# Altium PCB ingredionradar.PcbDoc
Units mm, origin at the board's own origin, x right, y up, seen from the top; angles counter-clockwise.
Board outline 26 x 19 mm, 4 copper layers (Top Layer, Layer 1, Layer 2, Bottom Layer), stack 0.998 mm thick; 33 components, 32 nets, 171 pads, 53 vias.
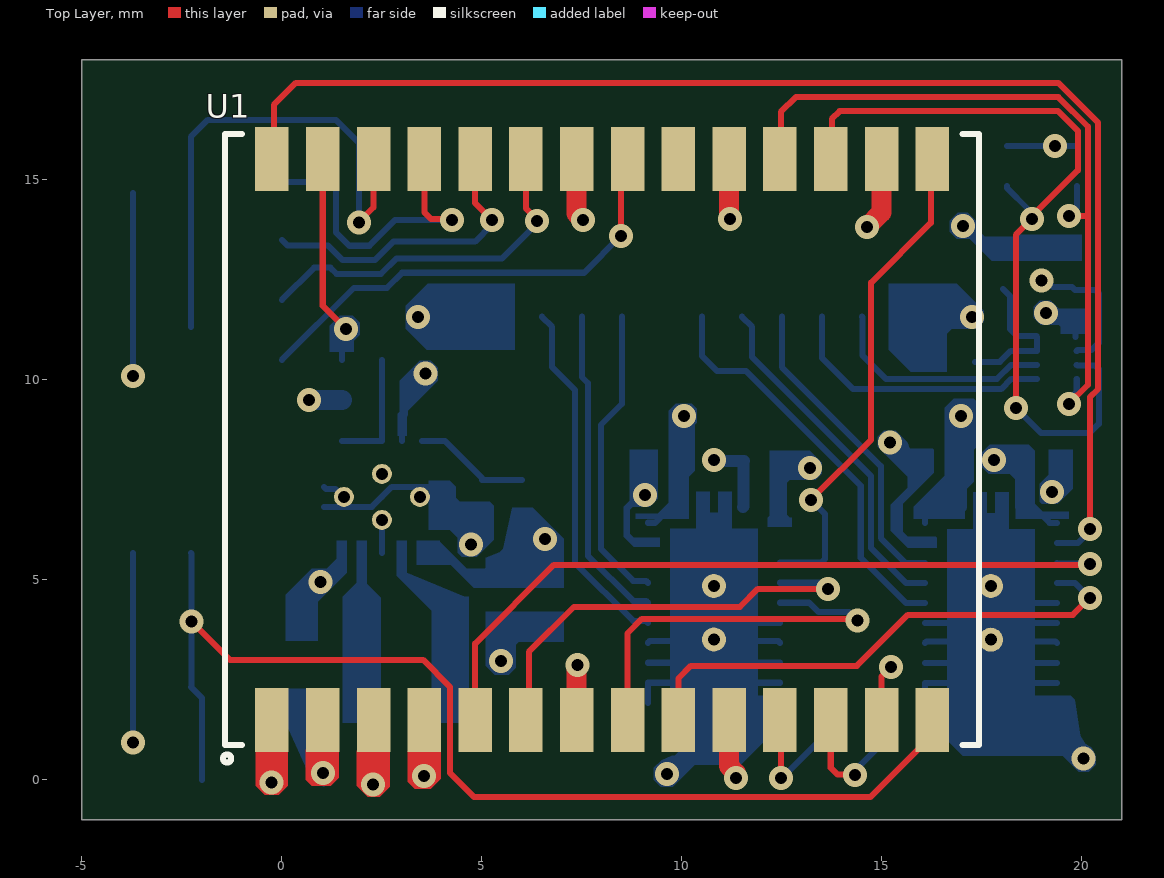
[diagram p0: Top Layer view]
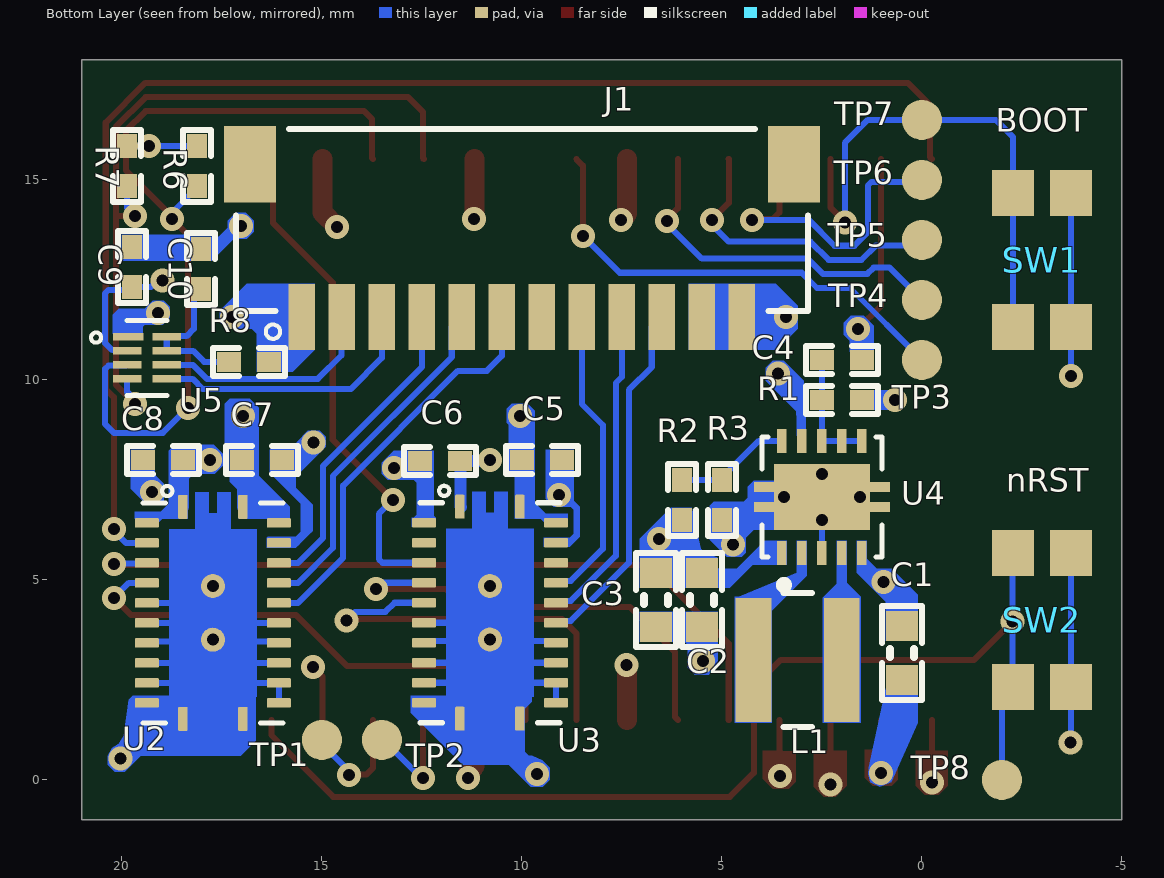
[diagram p1: Bottom Layer view, seen from below]
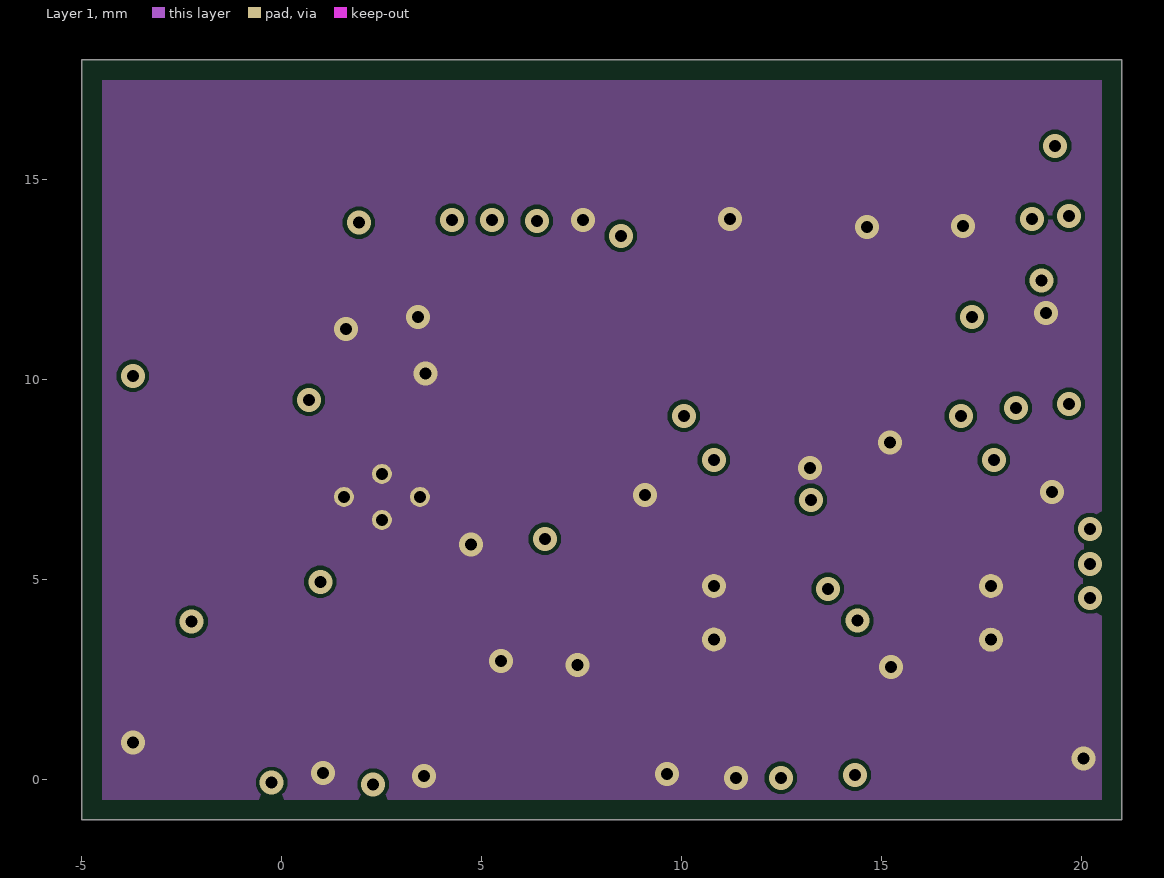
[diagram p2: Layer 1]
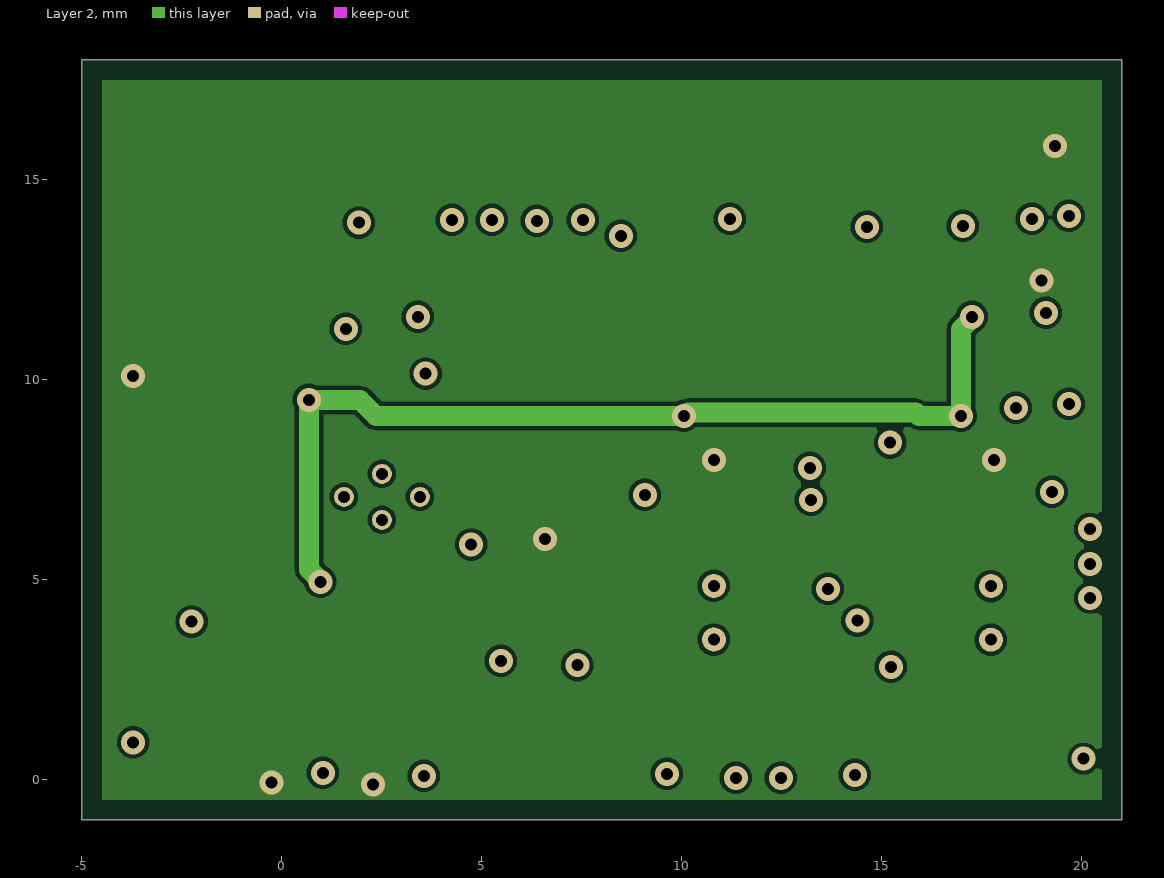
[diagram p3: Layer 2]
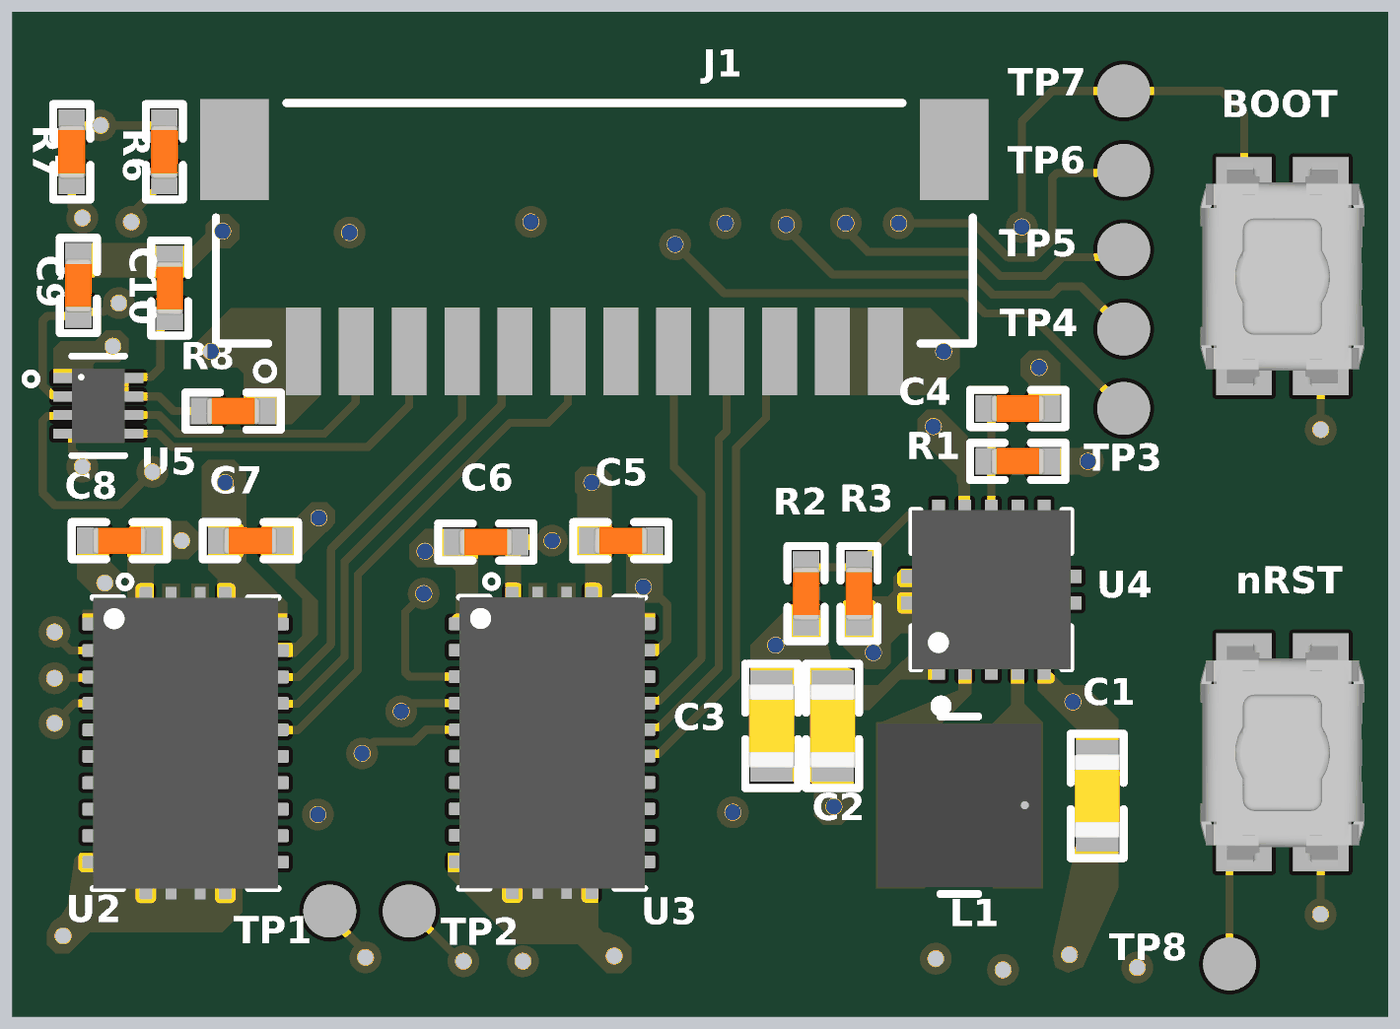
[diagram p4: 3D render of the assembled board from below, using the file's embedded part models]

## Layer stack, top to bottom
Top Solder: solder mask 0.001, Solder Resist, Dk 3.5
Top Layer: signal copper 0.03
Dielectric 1: prepreg 0.0711, PP-006, Dk 4.1
Layer 1: signal copper 0.035
Dielectric 2: prepreg 0.7258, PP-006, Dk 4.1
Layer 2: signal copper 0.035
Dielectric 4: core 0.0711, Dk 4.2
Bottom Layer: signal copper 0.03
Bottom Solder: solder mask 0.001, Solder Resist, Dk 3.5

## Board outline
-5,-1 -5,18 21,18 21,-1

## Design rules (kind name [scope] priority, off if disabled: settings)
BoardOutlineClearance [All] p1: gap=0.5 ignorepadtopadclearanceinfootprint=FALSE
Clearance Polygon_ANT [(InNamedPolygon('Top_Layer-GND')) or (InNamedPolygon('Bottom_Layer-GND')) vs InNet('RF')] p1: gap=0.127 ignorepadtopadclearanceinfootprint=FALSE except(0: Arc-Hole Track-Hole SMDPad-Hole THPad-Hole Via-Hole Fill-Hole Poly-Hole Region-Hole Text-Hole)
Clearance Polygon [(InNamedPolygon('Top_Layer-GND')) or (InNamedPolygon('Bottom_Layer-GND')) or (InNamedPolygon('Mid_Layer_1-GND')) or (InNamedPolygon('Mid_Layer_2-GND'))] p2: gap=0.2 ignorepadtopadclearanceinfootprint=FALSE except(0: Arc-Hole Track-Hole SMDPad-Hole THPad-Hole Via-Hole Fill-Hole Poly-Hole Region-Hole Text-Hole)
Clearance [All] p3: gap=0.1 ignorepadtopadclearanceinfootprint=FALSE
ComponentClearance [All] p1 off: gap=0.254 collisioncheckmode=3 verticalgap=0.254 showdistances=FALSE
FabricationTestPointUsage TestPointUsage [All] p1: valid=0 allowmultiple=FALSE
FabricationTestpoint Testpoint [All] p1: side=3 testpointundercomponent=TRUE minsize=1.016 maxsize=2.54 preferedsize=1.524 minholesize=0 maxholesize=1.016 preferedholesize=0.813 testpointgrid=0.025 allowsidetop=TRUE allowsidebottom=TRUE usegrid=TRUE gridtolerance=0
Height [All] p1 off: minheight=0 maxheight=25.4 prefheight=12.7
HoleSize [All] p1: absolutevalues=TRUE maxlimit=4.064 minlimit=0.076 maxpercent=80.000 minpercent=20.000
HoleToHoleClearance [All] p1 off: gap=0.076 allowstackedmicrovias=FALSE
MinimumAnnularRing [All] p1 off: minimumring=0.2
MinimumSolderMaskSliver [All] p1: minsoldermaskwidth=0.127
PlaneClearance [All] p1: clearance=0.5
PolygonConnect PolygonConnect_1V8 [isVia and innet('1V8')] p1: connectstyle=Direct reliefconductorwidth=0.254 reliefentries=4 polygonreliefangle="90 Angle" airgapwidth=0.254
PolygonConnect PolygonConnect_3V3_SHDN [isVia and innet('3V3_SHDN')] p2: connectstyle=Direct reliefconductorwidth=0.254 reliefentries=4 polygonreliefangle="90 Angle" airgapwidth=0.254
PolygonConnect PolygonConnect_VLOAD [isVia and innet('VLOAD')] p3: connectstyle=Direct reliefconductorwidth=0.254 reliefentries=4 polygonreliefangle="90 Angle" airgapwidth=0.254
PolygonConnect PolygonConnect_NetD4_2 [isVia and innet('NetD4_2')] p4: connectstyle=Direct reliefconductorwidth=0.254 reliefentries=4 polygonreliefangle="90 Angle" airgapwidth=0.254
PolygonConnect PolygonConnect_VBATT [isVia and innet('VBATT')] p5: connectstyle=Direct reliefconductorwidth=0.254 reliefentries=4 polygonreliefangle="90 Angle" airgapwidth=0.254
PolygonConnect PolygonConnect_VDD_NRF [isVia and innet('VDD_NRF')] p6: connectstyle=Direct reliefconductorwidth=0.254 reliefentries=4 polygonreliefangle="90 Angle" airgapwidth=0.254
PolygonConnect PolygonConnect_GND [(isVia or IsPad) and innet('GND')] p7: connectstyle=Direct reliefconductorwidth=0.254 reliefentries=4 polygonreliefangle="90 Angle" airgapwidth=0.254
PolygonConnect [All] p8: connectstyle=Relief reliefconductorwidth=0.254 reliefentries=4 polygonreliefangle="90 Angle" airgapwidth=0.254
RoutingVias [All] p1: holewidth=0.3 width=0.6 viastyle="Through Hole" minholewidth=0.15 minwidth=0.3 maxholewidth=0.7 maxwidth=1.3
SilkToSilkClearance [All] p1: silktosilkclearance=0.127
SilkToSolderMaskClearance SilkscreenOverComponentPads [IsPad] p1: minsilkscreentomaskgap=0.254 clearancetoexposedcopper=TRUE
SolderMaskExpansion [All] p1: expansion=0.076 istentingtop=FALSE
SupplyNets "Schematic Supply Nets_2" [InNet('VIN')] p1: voltage=0.000
SupplyNets "Schematic Supply Nets_1" [InNet('GND')] p2: voltage=0.000
SupplyNets "Schematic Supply Nets" [InNet('1V8')] p3: voltage=0.000
Width [All] p1: maxlimit=2.54 minlimit=0.152 preferedwidth=0.152
20 further rules are at their usual default settings.

## Components (designator, comment, footprint, x,y, rotation, side; value= is the part's Value field where it differs from the comment)
C1 "10uF" CAP0603 0.5,3.175 r90 bottom
C2 "10uF" CAP0603 5.5,4.5 r90 bottom
C3 "10uF" CAP0603 6.65,4.5 r90 bottom
C4 "0.1uF" CAP0402 2,10.5 r0 bottom
C5 "1uF" CAP0402 9.5,8 r0 bottom
C6 "1uF" CAP0402 12.05,7.975 r180 bottom
C7 "1uF" CAP0402 16.5,8 r0 bottom
C8 "1uF" CAP0402 18.975,8 r180 bottom
C9 "1uF" CAP0402 19.75,12.825 r270 bottom
C10 "1uF" CAP0402 18.025,12.775 r270 bottom
J1 "SM12B-SRSS-TB" CONN_SM12B-SRSS-TBLFSN_JST 10,14 r0 bottom
L1 "VLS3012HBX-2R2M" IND_VLS3012HBX_TDK 3.105,3 r0 bottom
R1 "100" RES0402 2,9.5 r180 bottom
R2 "523k" RES0402 6,7 r270 bottom
R3 "200k" RES0402 5,7 r90 bottom
R6 "2.2k" RES0402 18.125,15.35 r270 bottom
R7 "2.2k" RES0402 19.875,15.35 r270 bottom
R8 "200k" RES0402 16.825,10.45 r0 bottom
SW1 "EVP-AA402W" EVPXA -3,13 r90 bottom
SW2 "EVP-AA402W" EVPXA -3,4 r90 bottom
TP1 "TP_SMT" TP_SMT_1.5MM 15,1 r180 bottom
TP2 "TP_SMT" TP_SMT_1.5MM 13.5,1 r90 bottom
TP3 "TP_SMT" TP_SMT_1.5MM 0,10.5 r90 bottom
TP4 "TP_SMT" TP_SMT_1.5MM 0,12 r90 bottom
TP5 "TP_SMT" TP_SMT_1.5MM 0,13.5 r90 bottom
TP6 "TP_SMT" TP_SMT_1.5MM 0,15 r90 bottom
TP7 "TP_SMT" TP_SMT_1.5MM 0,16.5 r90 bottom
TP8 "TP_SMT" TP_SMT_1.5MM -2,0 r90 bottom
U1 "XM125" XM125_ACC 8.005,8.51 r90 top
U2 "SN74LVC8T245RHLR" IC_SN74LVC8T245RHLR 17.725,4.175 r180 bottom
U3 "SN74LVC8T245RHLR" IC_SN74LVC8T245RHLR 10.8,4.18 r180 bottom
U4 "TPS63000DRCR" CONV_TPS63000DRCR 2.5,7.075 r90 bottom
U5 "PCA9306DQER" SON35P140X100X40-8N 19.375,10.55 r180 bottom

## Footprints (in the part's own frame and the unit in brackets; to place one, negate y for a bottom-side part, rotate by r counter-clockwise, add the part's x,y. Pads: shape width x height; smd on the part's side, far side on the other; paste and mask are expansions set on the pad)
CAP0402 [mm]
  rect 0.6x0.5 smd: 1(-0.5,0) 2(0.5,0)
  silkscreen extent -0.9,-0.35 0.9,0.35, body extent -0.51,-0.25 0.51,0.25, height 0.5
CAP0603 [mm]
  rect 0.75x0.8 smd: 1(-0.675,0) 2(0.675,0)
  silkscreen extent -1.17,-0.5 1.17,0.5, body extent -0.8,-0.43 0.8,0.43, height 0.8
CONN_SM12B-SRSS-TBLFSN_JST [mil]
  rect 26x65 smd paste+0 mask+0: 1(216.54,95.33) 2(177.17,95.33) 3(137.8,95.33) 4(98.43,95.33) 5(59.06,95.33) 6(19.69,95.33) 7(-19.68,95.33) 8(-59.06,95.33) 9(-98.43,95.33) 10(-137.8,95.33) 11(-177.17,95.33) 12(-216.54,95.33)
  rect 51x75 smd paste+0 mask+0: 13(-267.72,-54.87) 14(267.72,-54.87)
  silkscreen extent -282,-90 282,117, body extent -276,-84 276,84, height 116
CONV_TPS63000DRCR [mm]
  rect 0.6x0.24 smd: 1(-1.4,1) 2(-1.4,0.5) 3(-1.4,0) 4(-1.4,-0.5) 5(-1.4,-1) 6(1.4,-1) 7(1.4,-0.5) 8(1.4,0) 9(1.4,0.5) 10(1.4,1)
  rect 1.65x2.4 smd paste-2: 11(0,0)
  rect 0.25x0.5 smd paste-1: 11_1(-0.25,1.45) 11_2(0.25,1.45) 11_3(0.25,-1.45) 11_4(-0.25,-1.45)
  round 0.5 hole 0.3 mask+0: 11_5(0,0.95) 11_6(-0.575,0) 11_7(0.575,0) 11_8(0,-0.95)
  silkscreen extent -2.25,-1.5 1.5,1.5, body extent -1.5,-1.5 1.5,1.5, height 1
EVPXA [mm] "Push-button switch"
  rect 1.15x1.05 smd: 1(-1.675,0.725) 1(1.675,0.725) 2(-1.675,-0.725) 2(1.675,-0.725)
  body extent -2.16,-1.55 2.14,1.55, height 1.7
IC_SN74LVC8T245RHLR [mm]
  rrect25% 0.24x0.6 smd: 1(-0.75,2.65) 12(-0.75,-2.65) 13(0.75,-2.65) 24(0.75,2.65)
  rrect25% 0.6x0.24 smd: 2(-1.65,2.25) 3(-1.65,1.75) 4(-1.65,1.25) 5(-1.65,0.75) 6(-1.65,0.25) 7(-1.65,-0.25) 8(-1.65,-0.75) 9(-1.65,-1.25) 10(-1.65,-1.75) 11(-1.65,-2.25) 14(1.65,-2.25) 15(1.65,-1.75) 16(1.65,-1.25) 17(1.65,-0.75) 18(1.65,-0.25) 19(1.65,0.25) 20(1.65,0.75) 21(1.65,1.25) 22(1.65,1.75) 23(1.65,2.25)
  round 0.6 hole 0.3 mask+0: 25(0,0.67) 26(0,-0.67)
  Top Layer region: 0.445,2.095 1.095,2.095 1.095,-2.095 0.445,-2.095 0.445,-3.02 0.105,-3.02 0.105,-2.495 -0.105,-2.495 -0.105,-3.02 -0.445,-3.02 -0.445,-2.095 -1.095,-2.095 -1.095,2.095 -0.445,2.095 -0.445,3.02 -0.105,3.02 -0.105,2.495 0.105,2.495 0.105,3.02 0.445,3.02
  silkscreen extent -1.75,-2.75 1.75,3.17, body extent -1.75,-2.75 1.75,2.75, height 1
IND_VLS3012HBX_TDK [mil]
  rect 35x122 smd paste+0 mask+0: 1(-43.5,0) 2(43.5,0)
  silkscreen extent -14,-66 14,66, body extent -61,-61 61,61, height 47
RES0402 [mm]
  rect 0.6x0.5 smd: 1(-0.5,0) 2(0.5,0)
  silkscreen extent -0.9,-0.35 0.9,0.35, body extent -0.51,-0.25 0.51,0.25, height 0.5
SON35P140X100X40-8N [mm]
  rect 0.77x0.19 smd: 1(-0.465,0.525)
  rect 0.71x0.19 smd: 2(-0.495,0.175) 3(-0.495,-0.175) 4(-0.495,-0.525) 5(0.495,-0.525) 6(0.495,-0.175) 7(0.495,0.175) 8(0.495,0.525)
  silkscreen extent -1.4,-0.94 0.5,0.94, body extent -0.5,-0.7 0.5,0.7, height 0.4
TP_SMT_1.5MM [mm]
  round 1 smd: 1(0,0)
XM125_ACC [mil]
  rect 63x33 smd paste+0 mask+0: 1(-276,325) 2(-276,275) 3(-276,225) 4(-276,175) 5(-276,125) 6(-276,75) 7(-276,25) 8(-276,-25) 9(-276,-75) 10(-276,-125) 11(-276,-175) 12(-276,-225) 13(-276,-275) 14(-276,-325) 15(276,-325) 16(276,-275) 17(276,-225) 18(276,-175) 19(276,-125) 20(276,-75) 21(276,-25) 22(276,25) 23(276,75) 24(276,125) 25(276,175) 26(276,225) 27(276,275) 28(276,325)
  silkscreen extent -318,-371 300,373, body extent -296,-366 295,366, height 63

## Part data
C1 C2 C3: library part CAP, "Chip Capacitor", Manufacturer="Samsung Electro-Mechanics", Part Number=CL10X106MO8NRNC, Note="CAP CER 10UF 16V X6S 0603", Specification="10 µF ±20% 16V Ceramic Capacitor X6S 0603 (1608 Metric)"
C4: library part CAP, "Chip Capacitor", Manufacturer="Samsung Electro-Mechanics", Part Number=CL05B104KP5NNNC, Note="CAP CER 0.1UF 10V X7R 0402", Specification="0.1 µF ±10% 10V Ceramic Capacitor X7R 0402 (1005 Metric)"
C5 C6 C7 C8 C9 C10: library part CAP, "Chip Capacitor", Manufacturer="Samsung Electro-Mechanics", Part Number=CL05B105KQ5NQNC, Note="CAP CER 1UF 6.3V X7R 0402", Specification="1 µF ±10% 6.3V Ceramic Capacitor X7R 0402 (1005 Metric)"
J1: library part SM12B-SRSS-TBLFSN, "Description", Manufacturer="JST Sales America Inc.", Note="CONN HEADER SMD R/A 12POS 1MM", Part Number=SM12B-SRSS-TB, Specification="Connector Header Surface Mount, Right Angle 12 position 0.039\" (1.00mm)"
L1: "Description", Manufacturer="TDK Corporation", Note="FIXED IND 2.2UH 3.15A 106 MOHM", Part Number=VLS3012HBX-2R2M, Specification="2.2 µH Shielded Drum Core, Wirewound Inductor 3.15 A 106mOhm Max Nonstandard"
R1: library part RES, "Chip Resistor", Manufacturer="Samsung Electro-Mechanics", Part Number=RCS1005F101CS, Note="RES 100 OHM 1% 1/16W 0402", Specification="100 Ohms ±1% 0.063W, 1/16W Chip Resistor 0402 (1005 Metric) Anti-Sulfur, Moisture Resistant Thick Film"
R2: library part RES, "Chip Resistor", Manufacturer="Samsung Electro-Mechanics", Part Number=RCS1005F5233CS, Note="RES 523K OHM 1% 1/16W 0402", Specification="523 kOhms ±1% 0.063W, 1/16W Chip Resistor 0402 (1005 Metric) Anti-Sulfur, Moisture Resistant Thick Film"
R3: library part RES, "Chip Resistor", Manufacturer="Samsung Electro-Mechanics", Part Number=RCS1005F204CS, Note="RES 200K OHM 1% 1/16W 0402", Specification="200 kOhms ±1% 0.063W, 1/16W Chip Resistor 0402 (1005 Metric) Anti-Sulfur, Moisture Resistant Thick Film"
R6 R7: library part RES, "Chip Resistor", Manufacturer="Samsung Electro-Mechanics", Part Number=RC1005F222CS, Note="RES SMD 2.2K OHM 1% 1/16W 0402", Specification="2.2 kOhms ±1% 0.063W, 1/16W Chip Resistor 0402 (1005 Metric) Moisture Resistant Thick Film"
R8: library part RES, "Chip Resistor", Manufacturer="Samsung Electro-Mechanics", Part Number=RC1005J204CS, Note="RES SMD 200K OHM 5% 1/16W 0402", Specification="200 kOhms ±5% 0.063W, 1/16W Chip Resistor 0402 (1005 Metric) Moisture Resistant Thick Film"
SW1 SW2: library part SW_TACT, "SPST, Off-Mom, no ground pin"
TP1 TP2 TP3 TP4 TP5 TP6 TP7 TP8: library part "Test Point", "Test point"
U1: "Description", Manufacturer="Acconeer AB", Note="A121 ENTRY+ RADAR SENSOR MODULE", Part Number=XM125, Specification="Radar Sensor Output"
U2 U3: "8-Bit Dual-Supply Bus Transceiver with Configurable Voltage-Level Shifting and Three-State Outputs 24-VQFN -40 to 85", Manufacturer="Texas Instruments", Note="IC TRANSLATION TXRX 5.5V 24-VQFN", Part Number=SN74LVC8T245RHLR, Specification="Translation Transceiver 1 Element 8 Bit per Element 3-State Output 24-VQFN (5.5x3.5)"
U4: "96% Buck-Boost Converter with 1.8A Current Switches in 3x3 QFN 10-VSON -40 to 85", Manufacturer="Texas Instruments", Note="IC REG BUCK BST ADJ 1.6A 10VSON", Part Number=TPS63000DRCR, Specification="Buck-Boost Switching Regulator IC Positive Adjustable 1.2V 1 Output 1.6A (Switch) 10-VFDFN Exposed Pad"
U5: "2-bit bidirectional 400-kHz I2C/SMBus voltage level translator", Manufacturer="Texas Instruments", Note="IC XLTR VL BIDIR 8-X2SON", Part Number=PCA9306DQER, Specification="Voltage Level Translator Bidirectional 1 Circuit 2 Channel 8-X2SON (1.4x1)"

## Via types
v1: diameter 0.6, hole 0.3, Top Layer to Bottom Layer, tented both sides, 53 vias

## Nets (pads, with @x,y where several pads share a name; then routed paths per layer and width w, separated by ;. In a path a pad name is that pad's centre, name@x,y a point inside that pad or via, vN(x,y) a via of type N, cw(c..) or ccw(c..) an arc to the next point about the centre after c; other vN are vias at no path point)
1V8: C2.2 C3.2 C6.2 C8.2 C9.2 R2.2 R6.1 R7.1 SW1.2 U1.1 U1.3 U2.1 U2.2 U3.1 U4.1 U5.2 | length 22.9
  Top Layer w0.152: v1(-0.257,-0.066) -0.25,-0.059 U1.1 ; v1(2.28,-0.111) 2.29,-0.1 U1.3
  Bottom Layer w0.152: v1(-3.725,10.1) -3.725,11.325 SW1.2@-3.725,14.675 ; U4.1 4.125,5.675 4.6,5.2 5.475,5.2 C2.2 ; C2.2@5.525,5.2 C2.2 ; R2.2 6,6.45 6.174,6.276 6.262,6.276 6.513,6.025 v1(6.575,6.025) 6.575,5.25 C3.2 C2.2 ; R6.1 v1(19.329,15.85) R7.1 ; U2.1@18.5,6.8 18.5,6.831 18.519,6.85 18.77,6.85 19.195,6.425 U2.2 ; v1(18.986,12.491) 19.107,12.491 19.273,12.325 C9.2 19.825,12.25 20.335,12.25 20.424,12.161 20.424,10.93 20.238,10.744 19.889,10.744 U5.2
  Bottom Layer w0.3: v1(10.8,8) 10.825,7.975 C6.2 11.537,7.963 11.537,6.832 U3.1@11.525,6.82 ; v1(17.8,8) C8.2 U2.1
CTS: J1.10 U3.18 | length 8.9
  Bottom Layer w0.152: J1.10 6.754,11.325 6.754,10.321 7.325,9.75 7.325,5.427 8.778,3.974 9.106,3.974 U3.18
GND: C1.1 C2.1 C3.1 C4.1 C5.1 C6.1 C7.1 C8.1 C9.1 C10.1 J1.11 J1.12 R3.1 SW2.2 U1.2 U1.4 U1.7 U1.10 U1.13 U1.16 U1.19 U1.22 U1.27 U2.6 U2.7 U2.8 U2.9 U2.10 U2.11 U2.12 U2.13 U2.14 U2.15 U2.16 U2.17 U2.18 U2.22 U2.25 U2.26 U3.2 U3.7 U3.8 U3.9 U3.10 U3.11 U3.12 U3.13 U3.14 U3.15 U3.16 U3.17 U3.22 U3.25 U3.26 U4.3 U4.9 U4.11 U4.11_1 U4.11_2 U4.11_3 U4.11_4 U4.11_5 U4.11_6 U4.11_7 U4.11_8 U5.1 | length 91.1
  Top Layer w0.152: U1.2 1.02,0.18 v1(1.025,0.175) ; U1.27 1.02,11.855 v1(1.6,11.275) ; v1(3.55,0.1) 3.56,0.11 U1.4 ; v1@9.62,0.155 v1(9.625,0.15) ; U1.13 14.99,2.59 v1(15.225,2.825)
  Top Layer w0.5: U1.7 7.37,2.853 v1(7.384,2.867) ; U1.22 7.37,14.155 v1(7.525,14) ; U1.10 11.18,0.343 11.35,0.173 v1(11.35,0.052) ; U1.19 11.18,14.045 v1(11.2,14.025) ; v1(14.625,13.825) 14.99,14.19 U1.16
  Bottom Layer w0.152: SW2.2@-3.725,5.675 -3.725,2.325 -3.725,0.946 v1(-3.72,0.941) ; U4.11_4 2.25,6.825 U4.11 2.75,7.325 U4.11_2 ; U4.11_3 1.099,7.276 1.337,7.276 1.538,7.075 U4.11_8 ; C4.1 1.5,11.175 v1(1.6,11.275) ; U4.3 U4.11_6 ; U4.9 3,9.06 3.076,9.136 3.076,9.637 v1(3.596,10.157) ; v1(3.4,11.575) 3.404,11.579 J1.12 J1.11 ; U4.11_1 4.725,6.825 5,6.55 R3.1 4.826,6.326 4.826,6.103 4.729,6.007 v1(4.729,5.885) ; v1(5.475,2.975) 5.5,3 C2.1 5.525,3.85 C3.1@6.575,3.85 ; C5.1 9,7.2 v1(9.075,7.125) 8.954,7.125 8.795,6.966 8.791,6.966 8.625,6.8 8.625,6.125 8.776,5.974 9.106,5.974 U3.22 ; U3.14 U3.15 10.455,2.43 10.8,2.775 ; U3.16 10.22,2.93 U3.26@10.76,3.47 ; U3.17 9.19,3.47 U3.26@10.76,3.47 ; v1(9.625,0.15) 10.05,0.575 ; U3.13 10.05,0.575 ; U3.12 U3.12@11.55,1.519 ; U3.11 12.45,1.625 12.3,1.475 11.594,1.475 U3.12@11.55,1.519 ; U3.10 11.12,2.43 11.05,2.5 10.8,2.75 10.8,2.775 ; U3.9 11.38,2.93 U3.26@10.84,3.47 ; U3.8 12.41,3.47 U3.26@10.84,3.47 ; U3.7 11.22,3.93 U3.26 ; U3.2 12.45,7.175 12.55,7.275 C6.1 12.724,7.801 13.199,7.801 v1(13.2,7.8) ; v1(15.205,8.43) 15.291,8.344 15.291,8.181 15.472,8 C7.1 16,7.525 15.3,6.825 15.3,6.25 15.625,5.925 U2.22 ; U2.14 U2.15 17.4,2.425 17.7,2.725 U2.26@17.7,3.48 ; U2.16 17.145,2.925 U2.26@17.685,3.465 ; U2.17 16.115,3.465 U2.26@17.685,3.465 ; U2.18 17.305,3.925 U2.26 ; U2.13 16.975,0.814 17.064,0.725 18.35,0.725 18.475,0.85 ; v1(17.025,13.85) 17.6,13.275 C10.1 18.075,13.325 C9.1 ; v1(19.1,11.675) 19.125,11.7 19.625,11.7 19.84,11.485 U5.1 ; v1(19.25,7.2) 19.25,7.297 19.475,7.522 C8.1 ; U2.11 19.375,1.589 19.286,1.5 18.5,1.5 U2.12 18.475,0.85 ; U2.10 18.175,2.425 17.725,2.875 U2.26 ; U2.9 18.305,2.925 U2.26@17.765,3.465 ; U2.8 19.335,3.465 U2.26@17.765,3.465 ; U2.7 18.145,3.925 ; U2.6 18.645,4.425 18.145,3.925 ; v1(20.039,0.53) 19.719,0.85 18.475,0.85 ; 10.05,0.575 11.4,0.575 11.55,0.725 U3.12@11.55,1.519 ; U3.26@10.76,3.47 U3.26 ; 10.8,2.775 U3.26 ; U3.26 U3.26@10.84,3.47 ; U2.26@17.685,3.465 U2.26@17.7,3.48 ; U2.26@17.7,3.48 U2.26 ; U2.26 U2.26@17.765,3.465 ; U2.26 18.145,3.925
INT: J1.4 U2.21 | length 7.9
  Bottom Layer w0.152: J1.4 12.5,10.321 14.975,7.846 14.975,6.046 15.601,5.42 16.07,5.42 U2.21
NetC4_2: C4.2 R1.1 U4.6 U4.7 U4.8 | length 3
  Bottom Layer w0.152: U4.6 U4.7 U4.8 R1.1 C4.2
NetC10_2: C10.2 R8.2 U5.7 U5.8 | length 3.9
  Bottom Layer w0.152: R8.2 17.947,10.45 18.222,10.725 U5.7 U5.8 18.861,11.094 18.381,11.094 18.199,11.276 18.199,12.101 C10.2
NetL1_1: L1.1 U4.4 | length 2.7
  Bottom Layer w0.152: L1.1 U4.4
NetL1_2: L1.2 U4.2 | length 3.3
  Bottom Layer w0.152: U4.2 3,5.147 3.674,4.473 3.841,4.473 4.21,4.105 L1.2
NetR2_1: R2.1 R3.2 U4.10 | length 2.9
  Bottom Layer w0.152: U4.10 4.075,8.475 5,7.55 R3.2 R2.1
NetTP1_1: TP1.1 U1.12 | length 3
  Top Layer w0.152: U1.12 13.72,0.305 13.891,0.134 14.316,0.134 v1(14.325,0.125)
  Bottom Layer w0.152: v1(14.325,0.125) 14.325,0.225 15,0.9 TP1.1
NetTP2_1: TP2.1 U1.11 | length 2.9
  Top Layer w0.152: U1.11 12.475,1.475 v1(12.475,0.052)
  Bottom Layer w0.152: v1(12.475,0.052) 12.513,0.052 13.461,1 TP2.1
NetTP3_1: TP3.1 U1.21 | length 11.7
  Top Layer w0.152: v1(8.475,13.6) 8.475,15.356 U1.21
  Bottom Layer w0.152: TP3.1 1.798,12.298 2.623,12.298 3.005,12.68 7.555,12.68 v1(8.475,13.6)
NetTP4_1: TP4.1 U1.23 | length 9
  Top Layer w0.152: U1.23 6.1,14.288 6.375,14.013 v1(6.375,13.975)
  Bottom Layer w0.152: TP4.1 0.807,12.807 1.207,12.807 1.365,12.65 2.477,12.65 2.859,13.032 5.5,13.032 6.375,13.907 v1(6.375,13.975)
NetTP5_1: TP5.1 U1.24 | length 7.6
  Top Layer w0.152: U1.24 4.825,15.516 4.825,14.425 v1(5.25,14)
  Bottom Layer w0.152: TP5.1 0.144,13.356 1.156,13.356 1.511,13.002 2.331,13.002 2.788,13.458 4.829,13.458 5.25,13.879 v1(5.25,14)
NetTP6_1: TP6.1 U1.25 | length 8
  Top Layer w0.152: U1.25 3.56,14.19 3.722,14.028 4.222,14.028 v1(4.25,14)
  Bottom Layer w0.152: TP6.1 0.05,14.95 1.26,14.95 1.349,14.861 1.349,13.691 1.686,13.354 2.186,13.354 2.832,14 v1(4.25,14)
RTS: J1.6 U2.19 | length 10.2
  Bottom Layer w0.152: J1.6 10.5,10.6 10.875,10.225 11.6,10.225 14.471,7.354 14.471,5.554 15.605,4.42 16.07,4.42 U2.19
RX: J1.9 U3.19 | length 8
  Bottom Layer w0.152: J1.9 7.5,10.073 7.65,9.923 7.65,5.602 8.778,4.474 9.106,4.474 U3.19
SCL: J1.2 U5.6 | length 5.7
  Bottom Layer w0.152: J1.2 14.511,11.568 14.511,10.614 15.101,10.024 17.877,10.024 18.228,10.375 U5.6
SDA: J1.3 U5.5 | length 6.8
  Bottom Layer w0.152: J1.3 13.5,10.55 14.278,9.772 17.982,9.772 18.235,10.025 U5.5
TX: J1.5 U2.20 | length 8.8
  Bottom Layer w0.152: J1.5 11.754,11.325 11.754,10.569 14.723,7.6 14.723,5.8 15.603,4.92 16.07,4.92 U2.20
VIN: C1.2 C5.2 C7.2 J1.1 R1.2 R8.1 U2.23 U2.24 U3.23 U3.24 U4.5 | length 36.7
  Layer 2 w0.5: v1(0.959,4.954) 0.959,4.981 0.675,5.264 v1(0.675,9.5) 1.95,9.5 2.35,9.1 10.077,9.1 10.157,9.18 15.849,9.18 15.929,9.1 v1(16.975,9.1) 16.975,11.266 17.246,11.537 v1(17.246,11.579)
  Bottom Layer w0.152: C1.2 0.525,3.875 0.525,4.686 0.614,4.775 0.78,4.775 v1(0.959,4.954) 1.5,5.495 U4.5 ; U3.23 9.33,6.43 9.589,6.689 9.589,6.719 9.702,6.832 U3.24@10.012,6.832 ; U2.23 16.075,6.725 16.175,6.825 16.931,6.825 16.95,6.844 U2.24@16.95,6.865 ; R8.1 16.325,11.579 ; v1(16.975,9.1) 16.975,8.025 C7.2
  Bottom Layer w0.3: C5.2 10.012,7.987 10.012,6.832 U3.24@10.025,6.82 ; U2.24 C7.2@16.975,8.025
  Bottom Layer w0.5: v1(0.675,9.5) R1.2 ; C5.2 10.05,8.05 v1(10.05,9.1) ; J1.1 16.325,11.579 v1(17.246,11.579)
WAKE: J1.8 U3.20 | length 7.5
  Bottom Layer w0.152: J1.8 8.5,9.398 7.975,8.873 7.975,5.777 8.778,4.974 9.106,4.974 U3.20
XM_BOOT0: SW1.1 TP7.1 U1.26 | length 13.2
  Top Layer w0.152: v1@1.97,13.975 v1(1.925,13.93) 1.925,13.947 2.29,14.312 U1.26
  Bottom Layer w0.152: SW1.1@-2.275,11.325 -2.275,14.675 -2.275,16.075 -1.85,16.5 TP7.1 1.35,16.5 1.925,15.925 v1(1.925,13.93)
XM_CTS: U1.8 U3.6 | length 10.2
  Top Layer w0.152: U1.8 8.64,3.665 9,4.025 14.344,4.025 v1(14.389,3.98)
  Bottom Layer w0.152: U3.6 13.18,4.43 13.411,4.199 14.17,4.199 v1(14.389,3.98)
XM_INT: U1.28 U2.3 | length 33.9
  Top Layer w0.152: U1.28 -0.2,15.571 -0.2,16.875 0.349,17.424 19.414,17.424 20.404,16.434 20.404,9.773 20.2,9.569 v1(20.2,6.275)
  Bottom Layer w0.152: U2.3 19.903,5.925 20.2,6.222 v1(20.2,6.275)
XM_R\S\T\: SW2.1 TP8.1 U1.14 | length 28.4
  Top Layer w0.152: v1(-2.26,3.957) -1.303,3 3.528,3 4.2,2.328 4.2,0.175 4.799,-0.424 14.717,-0.424 16.26,1.119 U1.14
  Bottom Layer w0.152: SW2.1@-2.275,5.675 -2.26,5.66 v1(-2.26,3.957) -2.26,2.34 -2.275,2.325 -2,2.05 TP8.1
XM_RTS: U1.9 U2.5 | length 13.1
  Top Layer w0.152: U1.9 9.91,2.535 10.225,2.85 14.375,2.85 15.65,4.125 19.775,4.125 v1(20.2,4.55)
  Bottom Layer w0.152: U2.5 19.825,4.925 v1(20.2,4.55)
XM_RX: U1.6 U3.5 | length 11.1
  Top Layer w0.152: U1.6 6.175,1.575 6.175,3.2 7.302,4.327 11.452,4.327 11.9,4.775 v1(13.65,4.775)
  Bottom Layer w0.152: U3.5 13.495,4.93 v1(13.65,4.775)
XM_SCL: R6.2 U1.17 U5.3 | length 20.5
  Top Layer w0.152: U1.17 13.75,15.551 13.75,16.525 13.945,16.72 19.405,16.72 19.9,16.225 19.9,15.237 18.75,14.087 v1(18.75,14.025) 18.35,13.625 v1(18.35,9.3)
  Bottom Layer w0.152: R6.2 18.125,14.8 18.664,14.261 18.664,14.111 v1(18.75,14.025) ; v1(18.35,9.3) 18.975,8.675 20.2,8.675 20.424,8.899 20.424,10.267 20.335,10.356 19.889,10.356 U5.3
XM_SDA: R7.2 U1.18 U5.4 | length 18.5
  Top Layer w0.152: U1.18 12.475,15.546 12.475,16.7 12.847,17.072 19.409,17.072 20.152,16.329 20.152,14.1 ; v1(19.675,9.4) 20.152,9.877 20.152,14.1 ; v1(19.675,14.1) 20.152,14.1
  Bottom Layer w0.152: v1(19.675,9.4) 19.675,9.507 19.87,9.702 U5.4 ; v1(19.675,14.1) 19.875,14.3 R7.2
XM_TX: U1.5 U2.4 | length 18.9
  Top Layer w0.152: U1.5 4.83,3.405 6.799,5.374 20.174,5.374 v1(20.2,5.4)
  Bottom Layer w0.152: U2.4 19.387,5.413 20.188,5.413 v1(20.2,5.4)
XM_WAKE: U1.15 U3.4 | length 12.6
  Top Layer w0.152: v1(13.225,7) 14.729,8.504 14.729,12.429 16.225,13.925 16.225,15.486 U1.15
  Bottom Layer w0.152: U3.4 13.486,5.43 13.575,5.519 13.575,6.65 v1(13.225,7)
pads on no net: J1.7 J1.13 J1.14 U1.20 U3.3 U3.21

## Polygon pours and split planes (outlines as drawn)
GND on Layer 1 "GND_L02_P000" (solid, pour order 0): -5,-1 -5,18 21,18 21,-1
1V8 on Layer 2 "1V8_L03_P001" (solid, pour order 1): -5,-1 -5,18 21,18 21,-1

## Other copper
Top Layer:
  region net 1V8: 0.15,-0.15 -0.075,-0.375 -0.425,-0.375 -0.65,-0.15 -0.65,0.725 0.15,0.725
  region net 1V8: 2.7,0.725 2.7,-0.175 2.45,-0.425 2.15,-0.425 1.875,-0.15 1.875,0.725
  region net GND: 1.425,0.75 1.425,0.05 1.225,-0.15 0.75,-0.15 0.6,0 0.6,0.75
  region net GND: 3.975,0.725 3.975,0.025 3.725,-0.225 3.325,-0.225 3.15,-0.05 3.15,0.722 3.476,0.733
Bottom Layer:
  region net GND: 0.9,2.275 1.325,0.3 1.343,0.15 1.291,-0.061 1.049,-0.171 0.768,-0.057 0.1,1.425 0.1,2.275
  region net VIN: 15.8,6.525 15.8,6.825 16.575,7.6 16.575,9.3 16.8,9.525 17.3,9.525 17.425,9.4 17.425,8.375 17.3,8.25 17.3,7.45 17.075,7.225 17.075,6.525
  region net VIN: 8.85,6.525 8.85,6.65 9.4,6.65 9.675,6.925 9.675,9.225 9.85,9.4 10.25,9.4 10.375,9.275 10.375,8.925 10.325,8.875 10.325,7.725 10.175,7.575 10.175,6.525 9.4,6.525
  region net VIN: 15.175,12.4 16.875,12.4 17.55,11.725 17.55,11.45 17.375,11.275 16.75,11.275 16.625,11.15 16.625,10.2 15.725,10.2 15.175,10.75
  region net VIN: 1.375,5.975 1.375,5.525 1.125,5.275 0.75,5.275 0.1,4.625 0.1,3.475 0.9,3.475 0.9,4.45 1.625,5.175 1.625,5.975
  region net 1V8: 5.53,5.778 5.759,6.8 6.275,6.8 7.05,6.025 7.05,4.8 4.8,4.8 4.225,5.375 3.375,5.375 3.375,5.975 3.95,5.975 3.95,5.95 4.625,5.275 5.075,5.275 5.1,5.3 5.1,5.55 5.442,5.691
  region net 1V8: 19.2,6.525 19.675,6.525 19.675,6.7 19.025,6.7 18.825,6.9 18.825,8.225 18.675,8.375 17.7,8.375 17.475,8.15 17.475,7.85 17.675,7.65 18.2,7.65 18.35,7.5 18.35,6.525
  region net GND: 8.7,8.25 8.7,6.975 8.55,6.825 8.55,6.075 8.8,5.825 9.45,5.825 9.45,6.05 8.8,6.05 8.7,6.15 8.7,6.75 8.775,6.825 9.2,6.825 9.4,7.025 9.4,8.25
  region net GND: 13.2,8.225 13.5,7.925 13.5,7.65 13.35,7.5 12.7,7.5 12.625,7.425 12.625,6.625 12.7,6.55 12.75,6.55 12.75,6.325 12.15,6.325 12.15,6.55 12.2,6.6 12.2,8.225
  region net GND: 15.65,7.575 15.65,7.3 15.225,6.875 15.225,6.225 15.65,5.8 16.375,5.8 16.375,6.05 16.35,6.075 15.65,6.075 15.525,6.2 15.525,6.9 16.3,7.675 16.3,8.25 16.275,8.275 15.7,8.275 15.629,8.446 15.35,8.725 15.05,8.725 14.9,8.575 14.9,8.325
  region net GND: 20,13.625 18.325,13.625 18.275,13.575 17.575,13.575 17.35,13.8 17.35,13.975 17.15,14.175 16.9,14.175 16.7,13.975 16.7,13.7 16.875,13.525 17.2,13.525 17.75,12.975 20,12.975
  region net GND: 19.475,11.15 19.475,11.325 19.425,11.375 18.975,11.375 18.8,11.55 18.8,11.825 18.95,11.975 19.225,11.975 19.425,11.775 20.075,11.775 20.225,11.625 20.225,11.15
  region net GND: 19.775,8.25 19.775,7.275 19.4,6.9 19,6.9 18.95,6.95 18.95,7.4 19.175,7.625 19.175,8.25
  region net GND: 7.05,4.2 5.1,4.2 5.1,2.85 5.325,2.625 5.675,2.625 5.85,2.8 5.85,3.375 5.925,3.45 7.05,3.45
  region net GND: 1.2,10.7 1.2,11.35 1.45,11.6 1.775,11.6 1.95,11.425 1.95,11.125 1.8,10.975 1.8,10.7
  region net GND: 2.9,9.15 2.95,9.2 2.95,9.975 3.45,10.475 3.725,10.475 3.9,10.3 3.9,9.975 3.125,9.2 3.125,8.6 2.9,8.6
  region net GND: 5.825,12.4 3.65,12.4 3.1,11.85 3.1,11.275 3.625,10.75 5.825,10.75
  region net GND: 4.2,7.475 4.35,7.325 4.35,7.05 4.45,6.95 5.2,6.95 5.3,6.85 5.3,6 4.875,5.575 4.5,5.575 4.4,5.675 4.4,6.05 4.2,6.25 3.675,6.25 3.675,7.475
  region net GND: 12.775,2.1 9.75,2.1 9.75,1.95 9.925,1.775 9.925,0.7 9.825,0.6 9.746,0.6 9.497,0.497 9.3,0.3 9.3,0 9.475,-0.175 9.775,-0.175 10.325,0.375 11.475,0.375 12.775,1.675 12.775,2
  region net GND: 16.625,2.1 16.65,2.075 16.65,0.975 17.025,0.6 19.525,0.6 19.925,0.2 20.175,0.2 20.35,0.375 20.35,0.607 20.246,0.8 20.084,0.907 19.955,1.11 19.824,2.001 19.725,2.1
  region net NetL1_1: 2.125,5.975 2.125,4.9 2.45,4.575 2.475,4.55 2.475,1.425 1.525,1.425 1.525,4.575 1.875,4.925 1.875,5.975
  region net NetL1_2: 3.125,5.975 3.125,5.175 4.574,4.575 4.675,4.575 4.675,1.425 3.75,1.425 3.75,4.225 2.875,5.1 2.875,5.975

## Silkscreen, mask and mechanical layers (free items; w line width, h text height)
Bottom Overlay:
  text "BOOT" at -1.84,16.008 h1
  text "nRST" at -2.114,7.008 h1
Board Outline:
  the board outline again, w0.2
Assembly Bot:
  text "U3" at 9.963,0.66 h1
  text "U2" at 19.364,0.635 h1